# Allegro board DRV10983_TEST_V10A.brd
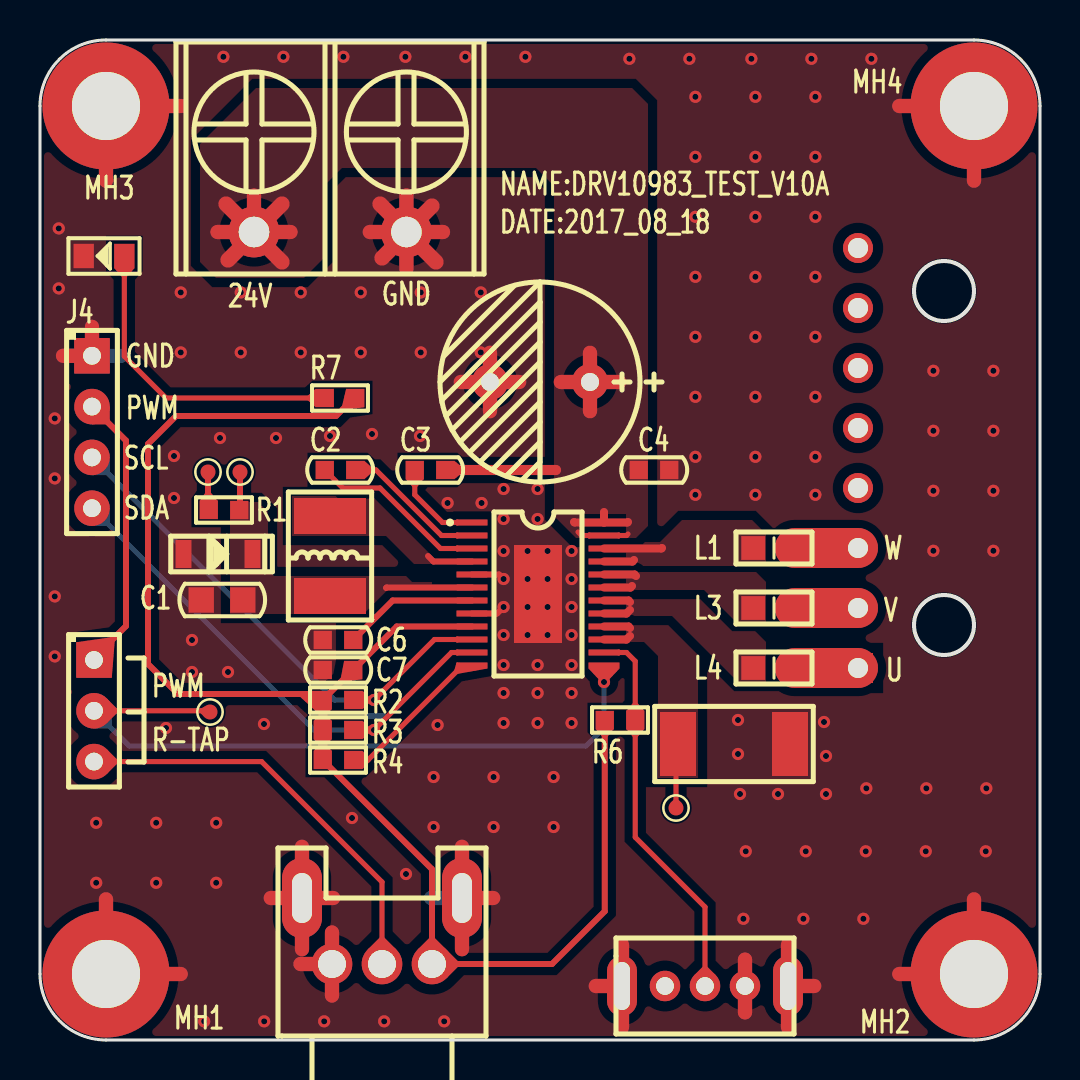
[diagram p0: board, top side]
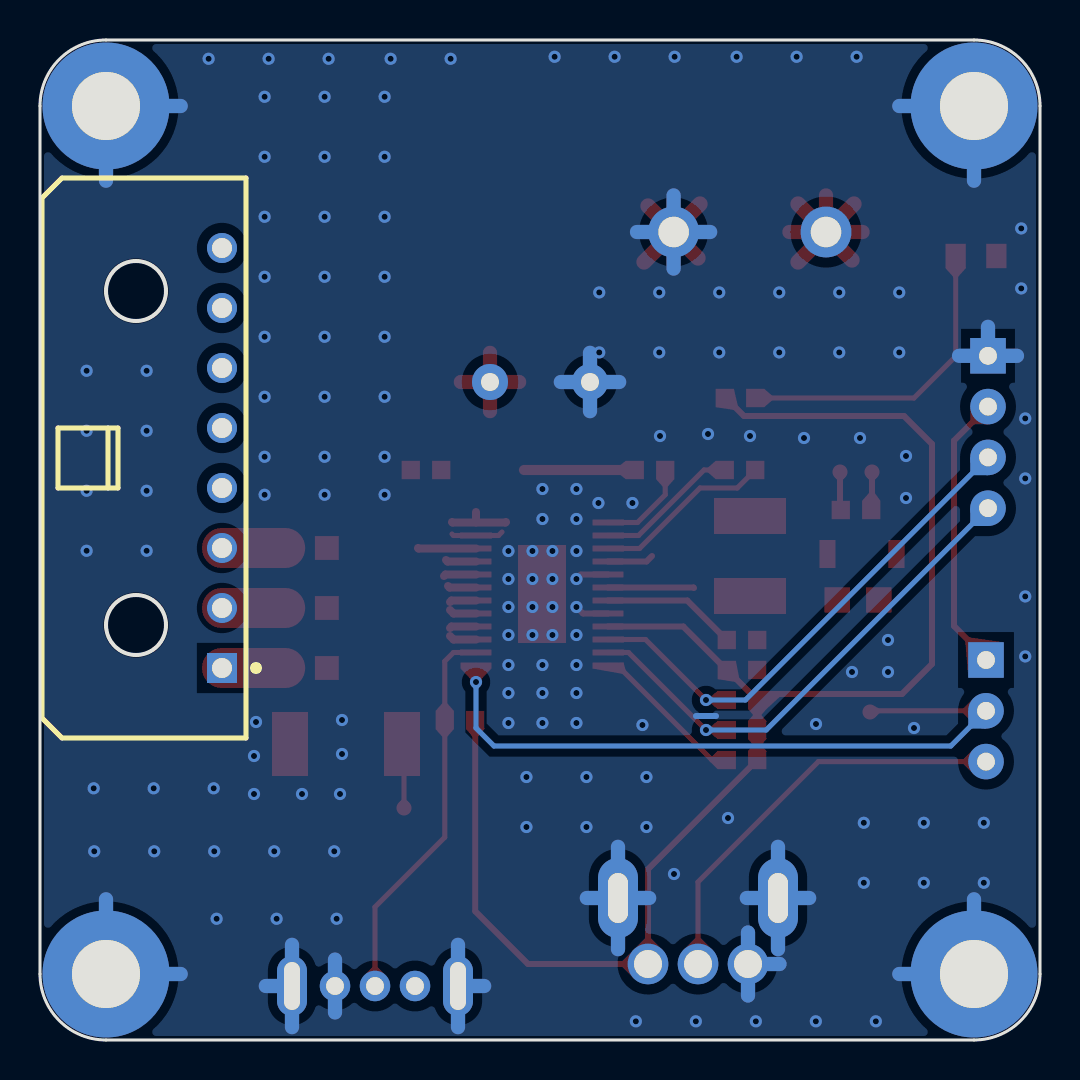
[diagram p1: board, bottom side, seen from below]

Outline 50 x 50 mm; copper layers: TOP, BOTTOM. Coordinates in mm from the lower left corner of the outline.
Outline path: 0,46.7 0,3.3 arc(0.97,0.97) 3.3,0 46.7,0 arc(49.03,0.97) 50,3.3 50,46.7 arc(49.03,49.03) 46.7,50 3.3,50 arc(0.97,49.03) 0,46.7

## Placement (name value [footprint] x y rotation side)
C1  10uF_25V  [CC0805]  9.1 22 0 top
C2  0.1uF_50V  [CC0603]  15 28.5 0 top
C3  0.1uF_50V  [CC0603]  19.5 28.5 0 top
C4  0.1uF_50V  [CC0603]  30.7 28.5 0 top
C5  100uF_50V_10X13  [CAP-5R0-10X13]  27.5 32.9 180 top
C6  1uF_50V  [CC0603]  14.9 20 0 top
C7  1uF_50V  [CC0603]  14.9 18.5 0 top
D1  BZT52C3V6  [SOD-123]  7.3 24.3 0 top
D19  LED_GREEN  [LED0805]  3.2 39.2 180 top
J2  -  [KF7R62-2P]  10.7 40.4 0 top
J3  -  [HEADER3X1_2R54]  2.7 19 270 top
J4  -  [HEADER4X1_2R54]  2.6 30.4 270 top
J5  -  [43650-0800]  40.9 29.1 0 bottom
L1  BEAD_BLM21PG600  [LC0805]  36.7 24.6 0 top
L2  SM4532-470MT  [L4532]  14.5 24.2 90 top
L3  BEAD_BLM21PG600  [LC0805]  36.7 21.6 0 top
L4  BEAD_BLM21PG600  [LC0805]  36.7 18.6 0 top
MH1  HOLD-M3  [HOLD250D134]  3.3 3.3 0 top
MH2  HOLD-M3  [HOLD250D134]  46.7 3.3 0 top
MH3  HOLD-M3  [HOLD250D134]  3.3 46.7 0 top
MH4  HOLD-M3  [HOLD250D134]  46.7 46.7 0 top
NOREF  -  []  0 0 90 top
NOREF#2  -  []  0 0 0 top
NOREF#3  -  []  0 0 0 top
NOREF#4  -  []  0 0 90 top
NOREF#5  -  []  0 0 0 top
NOREF#6  -  []  0 0 90 top
R1  0R  [RC0603]  9.2 26.5 180 top
R2  4.7K  [RC0603]  14.9 17 180 top
R3  4.7K  [RC0603]  14.9 15.5 180 top
R4  4.7K  [RC0603]  14.9 14 180 top
R5  0R01  [RC2512]  34.7 14.8 180 top
R6  10K  [RC0603]  29 16 180 top
R7  1K  [RC0603]  15 32.1 0 top
RP1  -  [R09-B103-3P]  14.6 3.8 0 top
SW1  SWITCH_3P  [SWITCH_3P_L]  29.1 2.7 0 top
TP1  TestPoint  [TP-0R75]  10 28.4 0 top
TP2  TestPoint  [TP-0R75]  8.4 28.4 0 top
TP3  TestPoint  [TP-0R75]  31.8 11.6 0 top
TP4  TestPoint  [TP-0R75]  8.5 16.4 0 top
U1  DRV10983PWPR  [HTSSOP-24]  24.9 22.3 270 top

## Library data of the parts
C1 = CAP NP_3
C2-C4 C6 C7 = CAP NP_2
C5 = CAPT_100UF_3528_6r3V_10%_LXXXX
D1 = PESD3V3S1UB_1
D19 = LED_4
J2 = CONN RCPT 2
J3 = CONN RCPT 3
J4 = CONN RCPT 4
J5 = 43650-0801
L1-L4 = IND_BEAD_0805_600OHM_200MA
MH1-MH4 = Hold_1
R1-R4 R6 R7 = R_Generic
R5 = R_10k_2
RP1 = RESISTOR VAR_1
SW1 = SWITCH_3P
TP1-TP4 = TestPoint
U1 = DRV10983PWPR

## Footprints (pads in the part's own frame, mm; a bottom-side part is the same pattern mirrored in y, then rotated)
43650-0800
  rect 1.5x1.5 hole 1: 1(0,10.5)
  round 1.5 hole 1: 2(0,7.5) 3(0,4.5) 4(0,1.5) 5(0,-1.5) 6(0,-4.5) 7(0,-7.5) 8(0,-10.5)
CAP-5R0-10X13
  round 1.8 hole 0.9: 1(0,0) 2(5,0)
CC0603
  rect 0.914x0.914 smd: 1(-0.762,0) 2(0.762,0)
CC0805
  rect 1.27x1.27 smd: 1(-1.041,0) 2(1.041,0)
HEADER3X1_2R54
  rect 1.778x1.778 hole 0.889: 1(0,0)
  round 1.778 hole 0.889: 2(2.54,0) 3(5.08,0)
HEADER4X1_2R54
  rect 1.778x1.778 hole 0.889: 1(-3.81,0)
  round 1.778 hole 0.889: 2(-1.27,0) 3(1.27,0) 4(3.81,0)
HOLD250D134
  round 6.35 hole 3.404: 1(0,0)
HTSSOP-24
  rect 0.3x1.55 smd: 1(-3.575,-3.3) 2(-2.925,-3.3) 3(-2.275,-3.3) 4(-1.625,-3.3) 5(-0.975,-3.3) 6(-0.325,-3.3) 7(0.325,-3.3) 8(0.975,-3.3) 9(1.625,-3.3) 10(2.275,-3.3) 11(2.925,-3.3) 12(3.575,-3.3) 13(3.575,3.3) 14(2.925,3.3) 15(2.275,3.3) 16(1.625,3.3) 17(0.975,3.3) 18(0.325,3.3) 19(-0.325,3.3) 20(-0.975,3.3) 21(-1.625,3.3) 22(-2.275,3.3) 23(-2.925,3.3) 24(-3.575,3.3)
  rect 4.9x2.4 smd: 25(0,0)
KF7R62-2P
  round 2.54 hole 1.524: 1(0,0) 2(7.62,0)
L4532
  rect 1.8x3.6 smd: 1(-2,0) 2(2,0)
LC0805
  rect 1.194x1.194 smd: 1(-1.041,0) 2(1.041,0)
LED0805
  rect 1.016x1.219 smd: 1(-1.016,0) 2(1.016,0)
R09-B103-3P
  round 2.032 hole 1.397: 1(0,0) 2(2.5,0) 3(5,0)
  oval 2x4 hole 1x2.5: 4(-1.5,3.3) 5(6.5,3.3)
RC0603
  rect 0.914x0.914 smd: 1(-0.762,0) 2(0.762,0)
RC2512
  rect 1.8x3.2 smd: 1(-2.8,0) 2(2.8,0)
SOD-123
  rect 0.8x1.4 smd: 1(-0.127,0) 2(3.327,0)
SWITCH_3P_L
  oval 1.5x3 hole 0.8x2.4: 1(0,0) 5(8.3,0)
  round 1.524 hole 0.889: 2(2.15,0) 3(4.15,0) 4(6.15,0)
TP-0R75
  round 0.75 smd: 1(0,0)

## Nets
GND: C1.1 C4.2 C5.2 C6.1 C7.1 D1.1 D19.2(CATHODE) J2.2 J4.1 MH1.1 MH2.1 MH3.1 MH4.1 R5.1 RP1.1(A) RP1.4 RP1.5 SW1.1 SW1.4 SW1.5 U1.5(SWGND) U1.8(GND_1) U1.25(GND_2)
V1P8V: C6.2 U1.7(V1P8)
V3P3: C7.2 R2.2 R3.2 R4.2 R6.2 R7.2 RP1.3(B) U1.9(V3P3)
VCC_24V: C3.2 C4.1 C5.1 J2.1 U1.23(VCC_1) U1.24(VCC_2)
MOTOR_DIR: R6.1 SW1.3 U1.14(DIR)
MOTOR_FG: R4.1 U1.12(FG)
MOTOR_SCL: J4.3 R2.1 U1.10(SCL)
MOTOR_SDA: J4.4 R3.1 U1.11(SDA)
MOTOR_SENSE: R5.2 TP3.1 U1.15(PGND_1) U1.16(PGND_2)
MOTOR_SPEED: J3.2 TP4.1 U1.13(SPEED)
MOTOR_U: L4.1(A) U1.17(U_1) U1.18(U_2)
MOTOR_V: L3.1(A) U1.19(V_1) U1.20(V_2)
MOTOR_W: L1.1(A) U1.21(W_1) U1.22(W_2)
PWMIN: J3.1 J4.2
VREG: C1.2 D1.2 L2.1(A) R1.1 TP1.1 U1.6(VREG)
VREG_3V3: R1.2 TP2.1
N16929558: J5.2 L3.2(B)
N16929583: J5.1 L4.2(B)
N16929729: C3.1 U1.1(VCP)
N16929742: C2.2 U1.2(CPP)
N16929751: C2.1 U1.3(CPN)
N16931027: L2.2(B) U1.4(SW)
N16932135: J5.3 L1.2(B)
N16933075: J3.3 RP1.2(WIPER)
N16934906: D19.1(ANODE) R7.1

Pads without a net: J5 4 5 6 7 8; SW1 2

## Via types
v1: diameter 0.61, hole 0.305, TOP to BOTTOM, 145 vias

## Routing (per net, layer and track width the routed paths; a pad name or vN(x,y) marks a point on that pad's centre or on a via; arc(x,y) is an arc through that point)
GND: length 173
  TOP w0.3: U1.8 22.85,21.32 v1(23.18,21.65) ; U1.5 22.95,23.27 v1(23.18,23.05)
  TOP w0.711: 11.54,7.1 RP1.4 ; RP1.4 13.1,4.54 ; RP1.4 14.66,7.1 ; RP1.4 13.1,9.66 ; 3.3,7.03 MH1.1 7.03,3.3 ; RP1.1 14.6,5.38 ; RP1.1 14.6,2.23 ; RP1.1 13.03,3.8 ; 29.1,0.64 SW1.1 ; SW1.1 27.79,2.7 ; SW1.1 29.1,4.76 ; 20.15,40.4 J2.2 16.49,40.4 ; 46.7,42.97 MH4.1 42.97,46.7 ; 1.15,34.21 J4.1 2.6,35.66 ; 46.7,7.03 MH2.1 42.97,3.3 ; 22.5,31.44 C5.2 ; C5.2 21.04,32.9 ; C5.2 22.5,34.36 ; C5.2 23.96,32.9 ; 35.25,4.02 SW1.4 35.25,1.38 ; SW1.5 38.71,2.7 ; SW1.5 37.4,4.76 ; SW1.5 37.4,0.64 ; RP1.5 21.1,9.66 ; RP1.5 21.1,4.54 ; RP1.5 22.66,7.1 ; 18.32,38.57 18.32,40.32 ; 7.03,46.7 MH3.1 3.3,42.97 ; 18.32,40.48 18.32,42.23
  TOP w0.762: 18.32,40.42 19.6,41.7 ; 18.32,40.42 18.32,40.48 17,41.8 ; 18.32,40.42 J2.2 18.32,40.38 ; 17.1,39.1 18.32,40.32 18.32,40.38 ; 18.32,40.38 19.8,38.9
  BOTTOM w0.3: 16.2,16.2 17.2,16.2
  BOTTOM w0.711: 19.54,7.1 RP1.5 ; RP1.5 21.1,4.54 ; RP1.5 21.1,9.66 ; RP1.5 22.66,7.1 ; 21.04,32.9 C5.2 ; C5.2 23.96,32.9 ; C5.2 22.5,31.44 ; C5.2 22.5,34.36 ; 35.25,4.02 SW1.4 35.25,1.38 ; RP1.1 14.6,5.38 ; RP1.1 14.6,2.23 ; RP1.1 13.03,3.8 ; 3.3,7.03 MH1.1 7.03,3.3 ; 42.97,46.7 MH4.1 46.7,42.97 ; 7.03,46.7 MH3.1 3.3,42.97 ; 1.15,34.21 J4.1 ; J4.1 2.6,35.66 ; J4.1 4.05,34.21 ; J2.2 18.32,42.23 ; J2.2 16.49,40.4 ; J2.2 18.32,38.57 ; J2.2 20.15,40.4 ; SW1.1 29.1,4.76 ; SW1.1 29.1,0.64 ; SW1.1 27.79,2.7 ; 37.4,0.64 SW1.5 ; SW1.5 38.71,2.7 ; SW1.5 37.4,4.76 ; 11.54,7.1 RP1.4 ; RP1.4 14.66,7.1 ; RP1.4 13.1,4.54 ; RP1.4 13.1,9.66 ; 42.97,3.3 MH2.1 46.7,7.03
  vias: v1(0.74,31.08) v1(0.74,28.08) v1(0.74,22.18) v1(0.74,19.18) v1(0.94,40.58) v1(0.94,37.58) v1(2.81,10.86) v1(2.81,7.86) v1(5.81,10.86) v1(5.81,7.86) v1(6.3,15.6) v1(6.7,29.2) v1(6.7,27.1) v1(7.04,37.38) v1(7.04,34.38) v1(7.6,20) v1(7.6,18.4) v1(8.21,0.93) v1(8.81,10.86) v1(8.81,7.86) v1(9,30.1) v1(9.17,49.16) v1(9.4,18.4) v1(10.04,37.38) v1(10.04,34.38) v1(11.2,15.8) v1(11.21,0.93) v1(11.8,30.1) v1(12.17,49.16) v1(13.04,37.38) v1(13.04,34.38) v1(14.21,0.93) v1(14.5,30.2) v1(15.17,49.16) v1(15.6,11.1) v1(16.04,37.38) v1(16.04,34.38) v1(16.6,30.3) v1(17.21,0.93) v1(18.27,49.16) v1(18.3,8.3) v1(19.04,37.38) v1(19.04,34.38) v1(19,30.2) v1(19.68,13.15) v1(19.68,10.65) v1(19.88,15.75) v1(20.21,0.93) v1(20.38,26.85) v1(21.27,49.16) v1(22.04,37.38) v1(22.04,34.38) v1(22.08,26.85) v1(22.68,13.15) v1(22.68,10.65) v1(23.18,27.55) v1(23.18,26.05) v1(23.18,24.45) v1(23.18,20.25) v1(23.18,18.75) v1(23.18,17.35) v1(23.18,15.85) v1(24.27,49.16) v1(24.38,24.45) v1(24.38,23.05) v1(24.38,21.65) v1(24.38,20.25) v1(24.88,27.55) v1(24.88,26.05) v1(24.88,18.75) v1(24.88,17.35) v1(24.88,15.85) v1(25.38,24.45) v1(25.38,23.05) v1(25.38,21.65) v1(25.38,20.25) v1(25.68,13.15) v1(25.68,10.65) v1(26.58,24.45) v1(26.58,23.05) v1(26.58,21.65) v1(26.58,20.25) v1(26.58,18.75) v1(26.58,17.35) v1(26.58,15.85) v1(29.47,49.06) v1(32.47,49.06) v1(32.77,47.16) v1(32.77,44.16) v1(32.77,41.16) v1(32.77,38.16) v1(32.77,35.16) v1(32.77,32.16) v1(32.77,29.16) v1(32.77,27.26) v1(34.9,16) v1(34.9,14.3) v1(35,12.3) v1(35.17,6.06) v1(35.29,9.44) v1(35.57,49.06) v1(35.77,47.16) v1(35.77,44.16) v1(35.77,41.16) v1(35.77,38.16) v1(35.77,35.16) v1(35.77,32.16) v1(35.77,29.16) v1(35.77,27.26) v1(36.9,12.3) v1(38.17,6.06) v1(38.29,9.44) v1(38.57,49.06) v1(38.77,47.16) v1(38.77,44.16) v1(38.77,41.16) v1(38.77,38.16) v1(38.77,35.16) v1(38.77,32.16) v1(38.77,29.16) v1(38.77,27.26) v1(39.2,15.9) v1(39.3,14.2) v1(39.3,12.3) v1(41.17,6.06) v1(41.32,12.58) v1(41.29,9.44) v1(41.57,49.06) v1(44.32,12.58) v1(44.29,9.44) v1(44.67,33.46) v1(44.67,30.46) v1(44.67,27.46) v1(44.67,24.46) v1(47.32,12.58) v1(47.29,9.44) v1(47.67,33.46) v1(47.67,30.46) v1(47.67,27.46) v1(47.67,24.46)
V1P8V: length 6.8
  TOP w0.3: U1.7 17.64,21.98 C6.2
V3P3: length 75.5
  TOP w0.3: R2.2 13.84,17.3 6.9,17.3 5.4,18.8 5.4,29.8 6.8,31.2 14.8,31.2 15.7,32.1 R7.2 ; R2.2 15.64,18.5 C7.2 17.84,20.68 U1.9 ; R2.2 R3.2 R4.2 19.6,8.54 RP1.3 25.6,3.8 28.24,6.44 R6.2
VCC_24V: length 30.6
  TOP w0.254: 26.9,25.4 27.07,25.23 U1.23 29.32,25.23 29.4,25.3
  TOP w0.4: 29.4,25.9 29.38,25.88 U1.24 ; 26.7,25.9 26.73,25.88 U1.24 ; U1.24 28.2,26.4
  TOP w0.508: C3.2 25.8,28.5
  TOP w0.711: J2.1 10.7,42.23 ; J2.1 8.87,40.4 ; J2.1 12.53,40.4 ; C5.1 28.96,32.9 ; C5.1 26.04,32.9 ; C5.1 27.5,34.36 ; C5.1 27.5,31.44
  TOP w0.762: 10.7,40.3 J2.1 ; 10.7,40.3 12.1,38.9 ; 10.7,40.3 9.4,39 ; J2.1 12.1,41.8 ; J2.1 9.3,41.8
MOTOR_DIR: length 19.4
  TOP w0.254: SW1.3 33.25,6.65 29.76,10.14 R6.1 29.76,18.94 29.32,19.38 U1.14
MOTOR_FG: length 7.9
  TOP w0.254: U1.12 21.12,18.73 16.4,14 R4.1
MOTOR_SCL: length 26.3
  TOP w0.254: 21.6,20.02 19.73,20.02 v1(16.7,17) R2.1
  BOTTOM w0.254: J4.3 14.73,17 v1(16.7,17)
MOTOR_SDA: length 26.2
  TOP w0.254: U1.11 20.57,19.38 v1(16.7,15.5) R3.1
  BOTTOM w0.254: J4.4 13.69,15.5 v1(16.7,15.5)
MOTOR_SENSE: length 5.9
  TOP w0.254: R5.2 31.8,14.7 TP3.1
  TOP w0.4: U1.16 29.43,20.68 29.5,20.6 ; 28.2,20.02 29.32,20.02 29.5,20.2
MOTOR_SPEED: length 35.6
  TOP w0.254: TP4.1 8.44,16.46 J3.2 ; U1.13 v1(28.2,17.9)
  BOTTOM w0.254: v1(28.2,17.9) 28.2,15.6 27.3,14.7 4.46,14.7 J3.2
MOTOR_U: length 2.7
  TOP w0.4: U1.18 29.43,21.98 29.5,21.9 ; U1.17 29.32,21.32 29.5,21.5
MOTOR_V: length 3.1
  TOP w0.4: U1.19 29.52,22.62 29.6,22.7 ; 29.8,23.2 29.73,23.27 U1.20
MOTOR_W: length 4.4
  TOP w0.4: 29.7,24 29.62,23.93 U1.21 ; 31.1,24.6 31.07,24.57 U1.22
PWMIN: length 14
  TOP w0.3: J4.2 4.3,29.97 4.3,20.7 2.7,19.1 J3.1
VREG: length 6.2
  TOP w0.3: U1.6 17.32,22.62 17.3,22.6 ; R1.1 10,26.54 TP1.1
VREG_3V3: length 1.9
  TOP w0.3: R1.2 8.4,26.54 TP2.1
N16929558: length 3.2
  TOP w2: L3.2 J5.2
N16929583: length 3.2
  TOP w2: L4.2 J5.1
N16929729: length 4.7
  TOP w0.254: U1.1 20.12,25.88 18.74,27.26 C3.1
N16929742: length 7.2
  TOP w0.254: U1.2 20.07,25.23 16.8,28.5 C2.2
N16929751: length 9
  TOP w0.254: C2.1 15.14,27.6 17,27.6 20.02,24.57 U1.3
N16931027: length 2.3
  TOP w0.3: U1.4 19.68,23.93 19.4,24.2
N16932135: length 3.2
  TOP w2: J5.3 L1.2
N16933075: length 21
  TOP w0.254: J3.3 11.08,13.92 17.1,7.9 RP1.2
N16934906: length 15.9
  TOP w0.254: D19.1 4.22,34.18 6.3,32.1 R7.1

## Copper pours and planes (outline as drawn; the poured copper is in the pictures)
GND on TOP: 3.3,49.8 46.7,49.8 49.8,46.7 49.8,3.3 46.7,0.2 3.3,0.2 0.2,3.3 0.2,46.7 ; 3 cut-outs
GND on BOTTOM: 3.3,49.8 46.7,49.8 49.8,46.7 49.8,3.3 46.7,0.2 3.3,0.2 0.2,3.3 0.2,46.7
V3P3 on TOP (solid shape): 19.49,5.13 19.6,5.17 19.71,5.13 20.32,4.52 19.6,3.76 18.88,4.52
V3P3 on TOP (solid shape): 20.93,3.91 20.97,3.8 20.93,3.69 20.32,3.08 19.56,3.8 20.32,4.52
VCC_24V on TOP: 8.8,38.1 13.2,38.1 14.3,39.2 14.3,42.8 15.1,43.6 24.8,43.6 25.7,42.7 25.7,26.2 26.8,25.1 27.1,25.1 27.1,26.3 29.3,26.3 29.3,25.1 29.8,25.1 30.4,25.7 30.4,46.8 29.6,47.6 10.8,47.6 8,44.8 8,38.9
MOTOR_SENSE on TOP: 29.3,20.8 31.4,20.8 32.9,19.3 32.9,13.1 30.9,13.1 30.9,19.2 30.2,19.9 29.3,19.9
MOTOR_U on TOP: 36.3,17.9 36.3,19.9 35.7,20.5 34.6,20.5 33,22.1 29.3,22.1 29.3,21.2 31.6,21.2 34.9,17.9
MOTOR_V on TOP: 29.3,23.4 35.8,23.4 36.3,22.9 36.3,20.9 34.8,20.9 33.2,22.5 29.3,22.5
MOTOR_W on TOP: 29.3,24.9 31,24.9 32.1,26 35.6,26 36.3,25.3 36.3,23.9 36.1,23.7 29.3,23.7
PWMIN on TOP (solid shape): 3.58,20.14 3.69,20.1 3.74,19.99 3.59,18.11 2.67,18.97 1.81,19.89
VREG on TOP: 19.6,22.9 18.6,22.9 18.3,23.2 11.7,23.2 11.4,23.5 11.4,26.4 10.9,26.9 9.5,26.9 9.5,21.3 16.3,21.3 17.4,22.4 19.6,22.4
N16931027 on TOP: 19.6,24.2 19.6,23.8 18.7,23.8 17.3,25.2 12.6,25.2 12.6,27.2 16.6,27.2
N16933075 on TOP (solid shape): 17.01,5.15 17.1,5.18 17.19,5.15 17.82,4.52 17.1,3.77 16.38,4.52
V3P3 on TOP (solid shape): 15.69,18.53 16.12,18.04 15.18,17.89 15.07,17.94 15.03,18.05 15.2,18.96
V3P3 on TOP (solid shape): 15.79,32.12 16.22,31.64 15.24,31.49 15.13,31.54 15.09,31.65 15.3,32.56
V3P3 on TOP (solid shape): 14.17,16.99 13.68,16.54 12.96,17.21 12.93,17.35 13.04,17.45 13.68,17.46
MOTOR_DIR on TOP (solid shape): 33.16,3.69 33.25,3.72 33.34,3.69 33.79,3.24 33.25,2.67 32.71,3.24
MOTOR_SPEED on TOP (solid shape): 28.98,18.57 28.28,17.84 28.2,17.81 28.12,17.84 27.43,18.57 28.2,18.76
MOTOR_SPEED on TOP (solid shape): 3.87,16.55 3.9,16.46 3.87,16.37 3.33,15.83 2.67,16.46 3.33,17.09
N16933075 on TOP (solid shape): 3.87,14.01 3.9,13.92 3.87,13.83 3.33,13.29 2.67,13.92 3.33,14.55
N16934906 on TOP (solid shape): 4.72,38.59 4.29,38.11 4.22,38.08 4.14,38.11 3.71,38.59 4.22,39.23

Small or netless copper shapes (teardrops, artwork), in the pictures only: 34 on TOP, 6 on BOTTOM

## Text on the board
Ref Des/Silkscreen Top: SCL | SDA | GND | PWM | R-TAP | 24V | NAME:DRV10983_TEST_V10A | DATE:2017_08_18 | W | V | U
DIMENSION: FIGURE | SIZE | 0.3048 | 0.889 | 0.9 | 1.0 | 1.397 | 1.524 | 3.4036 | 2.4x0.8 | 2.5x1.0 | DRILL CHART: TOP to BOTTOM | ALL UNITS ARE IN MILLIMETERS | PLATED | QTY | 145 | 10 | 2 | 8 | 3 | 4
